# Altium PCB PCB1.pcbdoc
Units mm, origin at the board's own origin, x right, y up, seen from the top; angles counter-clockwise.
Board outline 75.52 x 74.32 mm, 2 copper layers (Top Layer, Bottom Layer); 3 components, 0 nets, 211 pads, 0 vias.
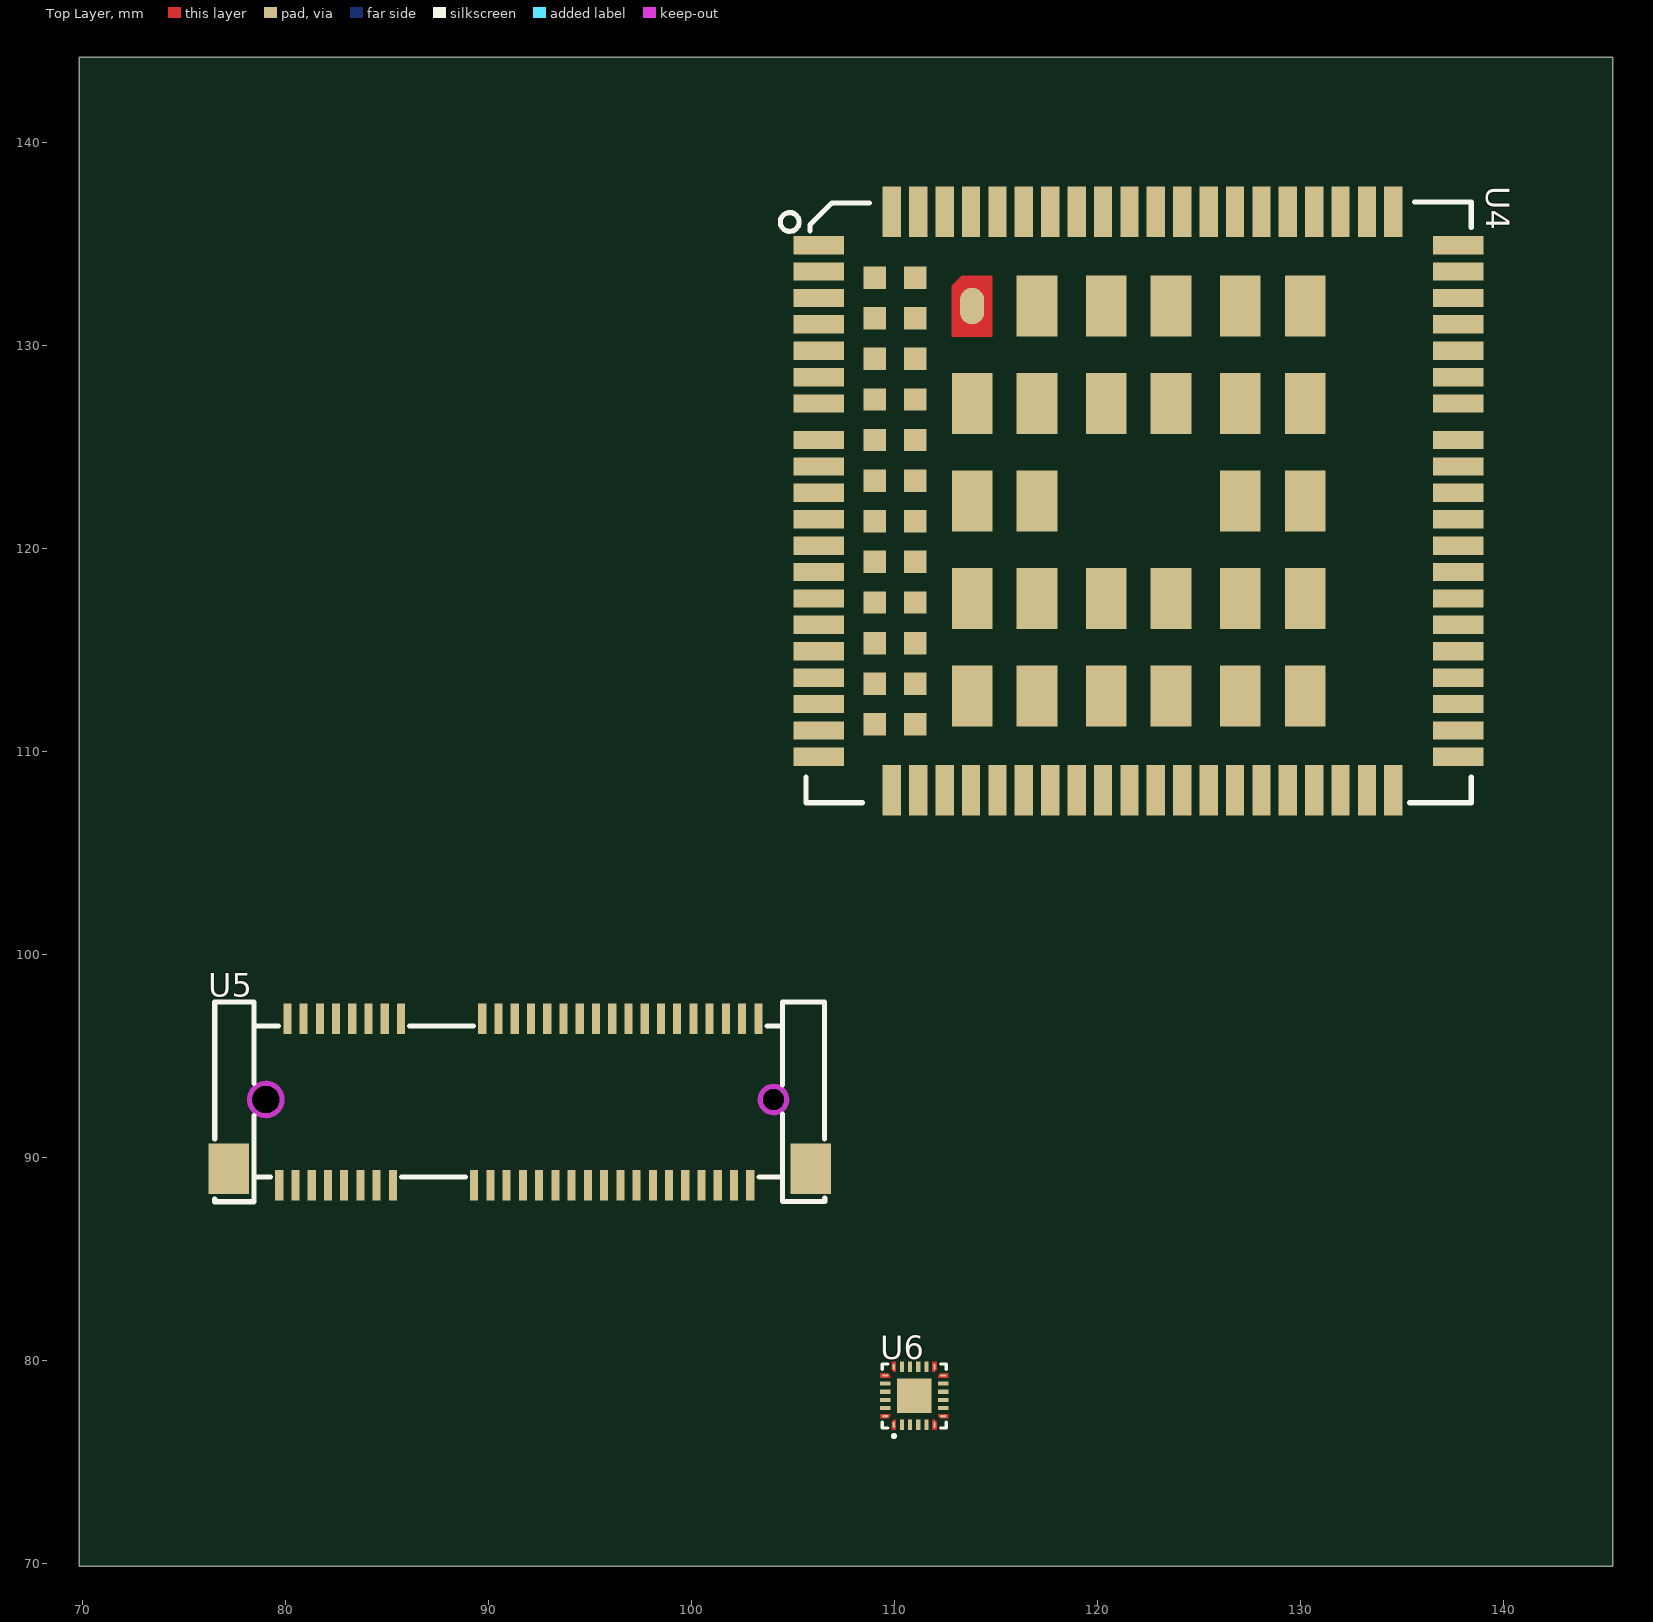
[diagram p0: Top Layer view]
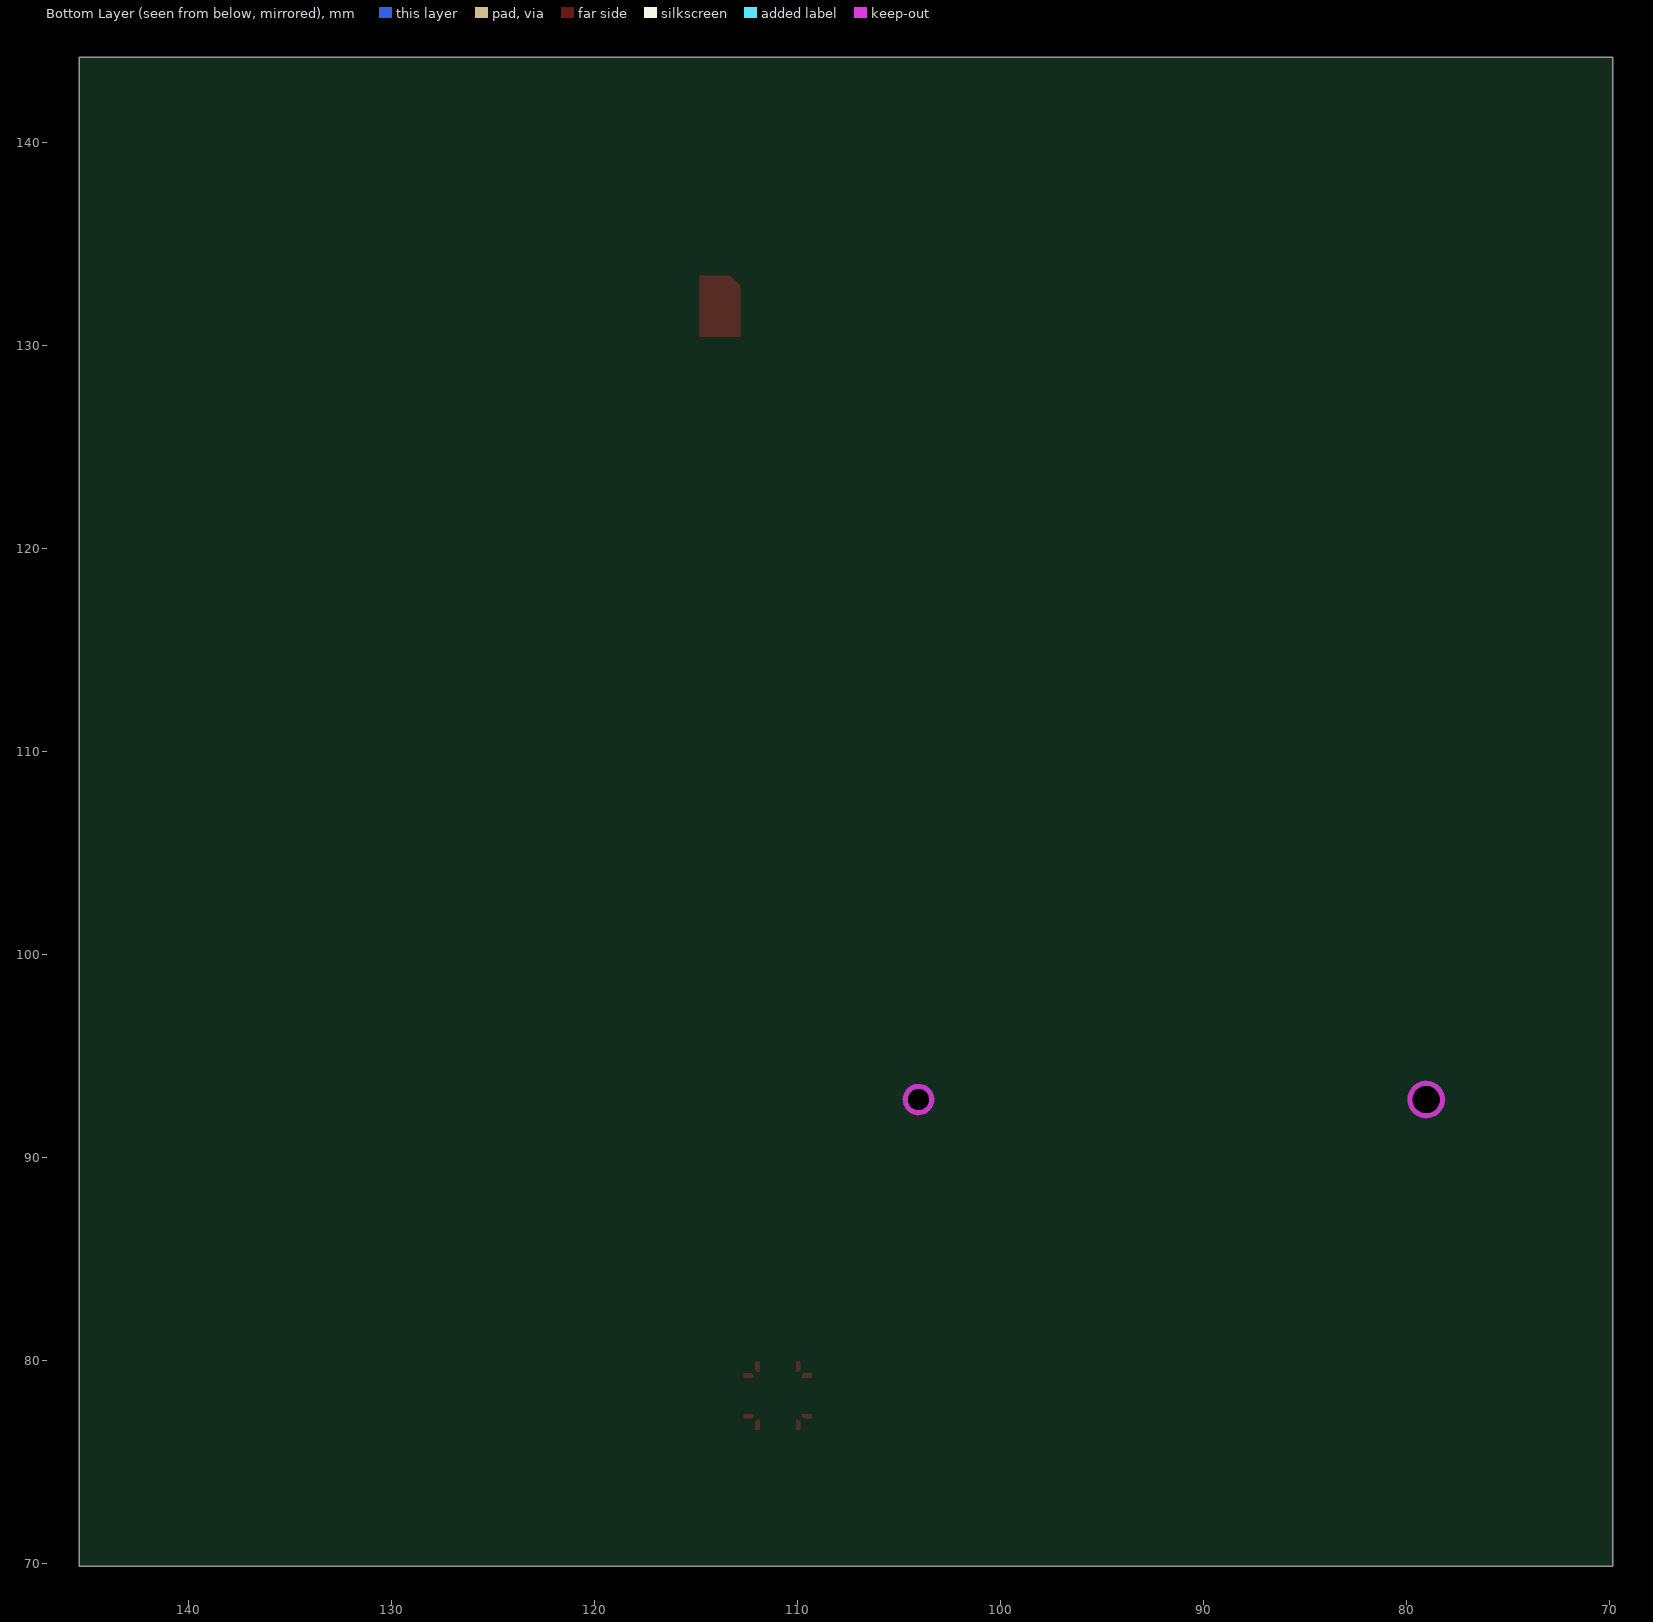
[diagram p1: Bottom Layer view, seen from below]

## Layer stack, top to bottom
Top Layer: signal copper (thickness not stored)
Dielectric: dielectric 0.32, FR-4, Dk 4.8
Bottom Layer: signal copper (thickness not stored)

## Board outline
145.366,69.85 69.85,69.85 69.85,144.174 145.366,144.174

## Design rules (kind name [scope] priority, off if disabled: settings)
BoardOutlineClearance copperThickness1oz [All] p0: genericclearance=0.254 ignorepadtopadclearanceinfootprint=FALSE except(0: Arc-SplitContinuation Track-SplitContinuation SMDPad-SplitContinuation THPad-SplitContinuation Via-SplitContinuation Fill-SplitContinuation Poly-SplitContinuation Region-SplitContinuation Text-SplitContinuation; 0.152: Track-CutoutEdge SMDPad-CutoutEdge THPad-CutoutEdge Via-CutoutEdge Region-CutoutEdge; 0.3: Track-OutlineEdge SMDPad-OutlineEdge THPad-OutlineEdge Via-OutlineEdge Fill-OutlineEdge Region-OutlineEdge Poly-OutlineEdge Text-OutlineEdge Fill-CutoutEdge)
BoardOutlineClearance copperThickness2oz [All] p0: genericclearance=0.254 ignorepadtopadclearanceinfootprint=FALSE except(0: Arc-SplitContinuation Track-SplitContinuation SMDPad-SplitContinuation THPad-SplitContinuation Via-SplitContinuation Fill-SplitContinuation Poly-SplitContinuation Region-SplitContinuation Text-SplitContinuation; 0.152: Track-CutoutEdge SMDPad-CutoutEdge THPad-CutoutEdge Via-CutoutEdge Region-CutoutEdge; 0.3: Track-OutlineEdge SMDPad-OutlineEdge THPad-OutlineEdge Via-OutlineEdge Fill-OutlineEdge Region-OutlineEdge Poly-OutlineEdge Text-OutlineEdge Fill-CutoutEdge)
Clearance copperThickness1oz [All] p1: gap=0.178 ignorepadtopadclearanceinfootprint=FALSE except(0.102: Track-Track; 0.152: Track-SMDPad SMDPad-SMDPad Track-THPad SMDPad-THPad THPad-THPad Track-Via SMDPad-Via THPad-Via Via-Via SMDPad-Fill THPad-Fill Via-Fill Fill-Fill Track-Region SMDPad-Region THPad-Region Via-Region Region-Region Track-Poly SMDPad-Poly THPad-Poly Via-Poly Fill-Poly Region-Poly Poly-Poly Track-Text SMDPad-Text THPad-Text Via-Text Fill-Text Region-Text Poly-Text Text-Text; 0.175: Track-Hole SMDPad-Hole THPad-Hole Via-Hole Fill-Hole Region-Hole Poly-Hole Text-Hole Sheet-Hole; 0.3: Track-Fill Fill-Region Track-Sheet SMDPad-Sheet THPad-Sheet Via-Sheet Fill-Sheet Region-Sheet Poly-Sheet Text-Sheet)
Clearance copperThickness2oz [All] p1: gap=0.178 ignorepadtopadclearanceinfootprint=FALSE except(0.152: Track-SMDPad SMDPad-SMDPad Track-THPad SMDPad-THPad THPad-THPad Track-Via SMDPad-Via THPad-Via Via-Via SMDPad-Fill THPad-Fill Via-Fill Fill-Fill Track-Region SMDPad-Region THPad-Region Via-Region Region-Region Track-Poly SMDPad-Poly THPad-Poly Via-Poly Fill-Poly Region-Poly Poly-Poly Track-Text SMDPad-Text THPad-Text Via-Text Fill-Text Region-Text Poly-Text Text-Text; 0.175: Track-Hole SMDPad-Hole THPad-Hole Via-Hole Fill-Hole Region-Hole Poly-Hole Text-Hole Sheet-Hole; 0.203: Track-Track; 0.3: Track-Fill Fill-Region Track-Sheet SMDPad-Sheet THPad-Sheet Via-Sheet Fill-Sheet Region-Sheet Poly-Sheet Text-Sheet)
DiffPairsRouting differentialPair [All] p1: maxuncoupledlength=10 minlimit=6 maxlimit=6 mostfreqgap=6 toplayer_minwidth=5 toplayer_prefwidth=10 toplayer_maxwidth=100 bottomlayer_minwidth=5 bottomlayer_prefwidth=10 bottomlayer_maxwidth=100
PasteMaskExpansion pasteMaskExpansion [All] p1: expansion=0
PlaneConnect innerPlane [All] p1: planeconnectstyle=Relief reliefexpansion=0.508 reliefentries=4 reliefconductorwidth=0.254 reliefairgap=0.254
PolygonConnect copperRegion [All] p1: connectstyle=Relief reliefentries=4 reliefconductorwidth=10 polygonreliefangle="90 Angle" airgapwidth=10
RoutingVias viaSize [All] p1: viastyle="Through Hole" holewidth=12.0078 minholewidth=11.811 maxholewidth=248.0314 width=24.0158 minwidth=19.685 maxwidth=393.7008
SolderMaskExpansion solderMaskExpansion [All] p1: useseparateexpansions=TRUE expansion=2 expansionbottom=2
Width copperThickness1oz [All] p1: maxlimit=100 minlimit=5 preferedwidth=10
Width copperThickness2oz [All] p1: maxlimit=100 minlimit=8 preferedwidth=10

## Components (designator, comment, footprint, x,y, rotation, side; value= is the part's Value field where it differs from the comment)
U4 "EC20CEHCLG-128-SNNS(纯数据版本),工作电压:3.3V~4.3V,温度范围:-35℃~+75℃,移远" LCC-LGA-144_L32.0-W29.0_EC20CEFRSG 122.016,122.324 r270 top
U5 "EC20R2.1_1" CONN-SMD_52P-P0.80_EC20R2.1MINIPCIE-C 91.536,92.733 r0 top
U6 "MPU-6500" QFN-24_L3.0-W3.0-P0.40-BL-EP 110.967,78.255 r0 top

## Footprints (in the part's own frame and the unit in brackets; to place one, negate y for a bottom-side part, rotate by r counter-clockwise, add the part's x,y. Pads: shape width x height; smd on the part's side, far side on the other; paste and mask are expansions set on the pad)
CONN-SMD_52P-P0.80_EC20R2.1MINIPCIE-C [mm]
  rect 0.4x1.5 smd: 1(-11.842,-4.1) 2(-11.442,4.1) 3(-11.042,-4.1) 4(-10.642,4.1) 5(-10.242,-4.1) 6(-9.842,4.1) 7(-9.442,-4.1) 8(-9.042,4.1) 9(-8.642,-4.1) 10(-8.242,4.1) 11(-7.842,-4.1) 12(-7.442,4.1) 13(-7.042,-4.1) 14(-6.642,4.1) 15(-6.242,-4.1) 16(-5.842,4.1) 17(-2.242,-4.1) 18(-1.842,4.1) 19(-1.442,-4.1) 20(-1.042,4.1) 21(-0.642,-4.1) 22(-0.242,4.1) 23(0.158,-4.1) 24(0.558,4.1) 25(0.958,-4.1) 26(1.358,4.1) 27(1.758,-4.1) 28(2.158,4.1) 29(2.558,-4.1) 30(2.958,4.1) 31(3.358,-4.1) 32(3.758,4.1) 33(4.158,-4.1) 34(4.558,4.1) 35(4.958,-4.1) 36(5.358,4.1) 37(5.758,-4.1) 38(6.158,4.1) 39(6.558,-4.1) 40(6.958,4.1) 41(7.358,-4.1) 42(7.758,4.1) 43(8.158,-4.1) 44(8.558,4.1) 45(8.958,-4.1) 46(9.358,4.1) 47(9.758,-4.1) 48(10.158,4.1) 49(10.558,-4.1) 50(10.958,4.1) 51(11.358,-4.1) 52(11.758,4.1)
  rect 2x2.5 smd: 53(-14.336,-3.297) 54(14.336,-3.297)
  Board Outline Layer circle w0.005: c-12.5,0.113 r0.8
  Board Outline Layer circle w0.005: c12.5,0.113 r0.65
  Board Outline Layer circle w0.254: c-12.5,0.113 r0.8
  Board Outline Layer circle w0.254: c12.5,0.113 r0.65
  Multi-Layer board cut-out: -11.7,0.113 -11.81,0.509 -12.103,0.798 -12.5,0.904 -12.897,0.798 -13.19,0.509 -13.3,0.113 -13.3,0.113 -13.19,-0.283 -12.897,-0.572 -12.5,-0.678 -12.103,-0.572 -11.81,-0.283 -11.7,0.113
  Multi-Layer board cut-out: 13.15,0.113 13.086,0.395 12.905,0.621 12.645,0.747 12.355,0.747 12.095,0.621 11.914,0.395 11.85,0.113 11.85,0.113 11.914,-0.169 12.095,-0.395 12.355,-0.521 12.645,-0.521 12.905,-0.395 13.086,-0.169 13.15,0.113
  silkscreen extent -15.02,-4.92 15.02,4.92
LCC-LGA-144_L32.0-W29.0_EC20CEFRSG [mm]
  rect 0.9x2.5 smd: 1(-12.6,-15.75) 2(-11.3,-15.75) 3(-10,-15.75) 4(-8.7,-15.75) 5(-7.4,-15.75) 6(-6.1,-15.75) 7(-4.8,-15.75) 8(-0.4,-15.75) 9(0.9,-15.75) 10(2.2,-15.75) 11(3.5,-15.75) 12(4.8,-15.75) 13(6.1,-15.75) 14(7.4,-15.75) 15(8.7,-15.75) 16(10,-15.75) 17(11.3,-15.75) 18(12.6,-15.75) 37(12.6,15.75) 38(11.3,15.75) 39(10,15.75) 40(8.7,15.75) 41(7.4,15.75) 42(6.1,15.75) 43(4.8,15.75) 44(3.5,15.75) 45(2.2,15.75) 46(0.9,15.75) 47(-0.4,15.75) 48(-4.8,15.75) 49(-6.1,15.75) 50(-7.4,15.75) 51(-8.7,15.75) 52(-10,15.75) 53(-11.3,15.75) 54(-12.6,15.75) 141(-3,-15.75) 142(-1.7,-15.75) 143(-1.7,15.75) 144(-3,15.75)
  rect 2.5x0.9 smd: 19(14.25,-9.55) 20(14.25,-8.25) 21(14.25,-6.95) 22(14.25,-5.65) 23(14.25,-4.35) 24(14.25,-3.05) 25(14.25,-1.75) 26(14.25,-0.45) 27(14.25,0.85) 28(14.25,2.15) 29(14.25,3.45) 30(14.25,4.75) 31(14.25,6.05) 32(14.25,7.35) 33(14.25,8.65) 34(14.25,9.95) 35(14.25,11.25) 36(14.25,12.55) 55(-14.25,12.55) 56(-14.25,11.25) 57(-14.25,9.95) 58(-14.25,8.65) 59(-14.25,7.35) 60(-14.25,6.05) 61(-14.25,4.75) 62(-14.25,3.45) 63(-14.25,2.15) 64(-14.25,0.85) 65(-14.25,-0.45) 66(-14.25,-1.75) 67(-14.25,-3.05) 68(-14.25,-4.35) 69(-14.25,-5.65) 70(-14.25,-6.95) 71(-14.25,-8.25) 72(-14.25,-9.55) 113(-14.25,-10.85) 114(-14.25,-12.15) 115(14.25,-10.85) 116(14.25,-12.15)
  rect 3x2 smd: 85(-9.6,8.2) 86(-4.8,8.2) 87(0,8.2) 88(4.8,8.2) 89(9.6,8.2) 90(-9.6,5) 91(-4.8,5) 92(0,5) 93(4.8,5) 94(9.6,5) 95(-9.6,1.6) 96(-4.8,1.6) 97(4.8,1.6) 98(9.6,1.6) 99(-9.6,-1.6) 100(-4.8,-1.6) 101(4.8,-1.6) 102(9.6,-1.6) 103(-9.6,-5) 104(-4.8,-5) 105(0,-5) 106(4.8,-5) 107(9.6,-5) 109(-4.8,-8.2) 110(0,-8.2) 111(4.8,-8.2) 112(9.6,-8.2)
  oval 1.8x1.2 smd: 108(-9.6,-8.2)
  rect 1.1x1.1 smd: 117(-11,-11) 118(-9,-11) 119(-7,-11) 120(-5,-11) 121(-3,-11) 122(-1,-11) 123(1,-11) 124(3,-11) 125(5,-11) 126(7,-11) 127(9,-11) 128(11,-11) 129(-11,-13) 130(-9,-13) 131(-7,-13) 132(-5,-13) 133(-3,-13) 134(-1,-13) 135(1,-13) 136(3,-13) 137(5,-13) 138(7,-13) 139(9,-13) 140(11,-13)
  Top Layer region: -11.1,-7.2 -8.1,-7.2 -8.1,-9.2 -10.6,-9.2 -11.1,-8.7
  silkscreen extent -14.73,-17.64 14.86,16.38
QFN-24_L3.0-W3.0-P0.40-BL-EP [mm]
  oval 0.12x0.303 smd: 1(-1,-1.427) 6(1,-1.427) 13(1,1.427) 18(-1,1.427)
  rect 0.2x0.505 smd: 2(-0.6,-1.427) 3(-0.2,-1.427) 4(0.2,-1.427) 5(0.6,-1.427) 14(0.6,1.427) 15(0.2,1.427) 16(-0.2,1.427) 17(-0.6,1.427)
  oval 0.303x0.12 smd: 7(1.427,-1) 12(1.427,1) 19(-1.427,1) 24(-1.427,-1)
  rect 0.505x0.2 smd: 8(1.427,-0.6) 9(1.427,-0.2) 10(1.427,0.2) 11(1.427,0.6) 20(-1.427,0.6) 21(-1.427,0.2) 22(-1.427,-0.2) 23(-1.427,-0.6)
  rect 1.7x1.7 smd: 25(0,0)
  Top Layer region: -1.1,1.68 -0.9,1.68 -0.9,1.175 -1,1.174 -1.1,1.274
  Top Layer region: -1.68,-1.1 -1.274,-1.1 -1.174,-1 -1.175,-0.9 -1.68,-0.9
  Top Layer region: 1.68,-1.1 1.275,-1.1 1.175,-1 1.175,-0.9 1.68,-0.9
  Top Layer region: 1.68,1.1 1.274,1.1 1.174,1 1.175,0.9 1.68,0.9
  Top Layer region: 1.1,1.68 0.9,1.68 0.9,1.175 1,1.174 1.1,1.274
  Top Layer region: -1.1,-1.68 -0.9,-1.68 -0.9,-1.175 -1,-1.174 -1.1,-1.275
  Top Layer region: 1.1,-1.68 0.9,-1.68 0.9,-1.175 1,-1.175 1.1,-1.275
  Top Layer region: -1.68,1.1 -1.274,1.1 -1.174,1 -1.175,0.9 -1.68,0.9
  silkscreen extent -1.58,-2.05 1.58,1.58

## Nets (pads, with @x,y where several pads share a name; then routed paths per layer and width w, separated by ;. In a path a pad name is that pad's centre, name@x,y a point inside that pad or via, vN(x,y) a via of type N, cw(c..) or ccw(c..) an arc to the next point about the centre after c; other vN are vias at no path point)
pads on no net: U4.1 U4.2 U4.3 U4.4 U4.5 U4.6 U4.7 U4.8 U4.9 U4.10 U4.11 U4.12 U4.13 U4.14 U4.15 U4.16 U4.17 U4.18 U4.19 U4.20 U4.21 U4.22 U4.23 U4.24 U4.25 U4.26 U4.27 U4.28 U4.29 U4.30 U4.31 U4.32 U4.33 U4.34 U4.35 U4.36 U4.37 U4.38 U4.39 U4.40 U4.41 U4.42 U4.43 U4.44 U4.45 U4.46 U4.47 U4.48 U4.49 U4.50 U4.51 U4.52 U4.53 U4.54 U4.55 U4.56 U4.57 U4.58 U4.59 U4.60 U4.61 U4.62 U4.63 U4.64 U4.65 U4.66 U4.67 U4.68 U4.69 U4.70 U4.71 U4.72 U4.85 U4.86 U4.87 U4.88 U4.89 U4.90 U4.91 U4.92 U4.93 U4.94 U4.95 U4.96 U4.97 U4.98 U4.99 U4.100 U4.101 U4.102 U4.103 U4.104 U4.105 U4.106 U4.107 U4.108 U4.109 U4.110 U4.111 U4.112 U4.113 U4.114 U4.115 U4.116 U4.117 U4.118 U4.119 U4.120 U4.121 U4.122 U4.123 U4.124 U4.125 U4.126 U4.127 U4.128 U4.129 U4.130 U4.131 U4.132 U4.133 U4.134 U4.135 U4.136 U4.137 U4.138 U4.139 U4.140 U4.141 U4.142 U4.143 U4.144 U5.1 U5.2 U5.3 U5.4 U5.5 U5.6 U5.7 U5.8 U5.9 U5.10 U5.11 U5.12 U5.13 U5.14 U5.15 U5.16 U5.17 U5.18 U5.19 U5.20 U5.21 U5.22 U5.23 U5.24 U5.25 U5.26 U5.27 U5.28 U5.29 U5.30 U5.31 U5.32 U5.33 U5.34 U5.35 U5.36 U5.37 U5.38 U5.39 U5.40 U5.41 U5.42 U5.43 U5.44 U5.45 U5.46 U5.47 U5.48 U5.49 U5.50 U5.51 U5.52 U5.53 U5.54 U6.1 U6.2 U6.3 U6.4 U6.5 U6.6 U6.7 U6.8 U6.9 U6.10 U6.11 U6.12 U6.13 U6.14 U6.15 U6.16 U6.17 U6.18 U6.19 U6.20 U6.21 U6.22 U6.23 U6.24 U6.25